# Altium PCB PCB2.PcbDoc (part 1 of 2)
Units mm, origin at the board's own origin, x right, y up, seen from the top; angles counter-clockwise.
Board outline 211.07 x 146.43 mm, 4 copper layers (Top Layer, Mid Layer 1, Mid Layer 2, Bottom Layer), stack 1.57 mm thick; 324 components, 350 nets, 1525 pads, 85 vias.
Unrouted connection lines stored in the file: 956.
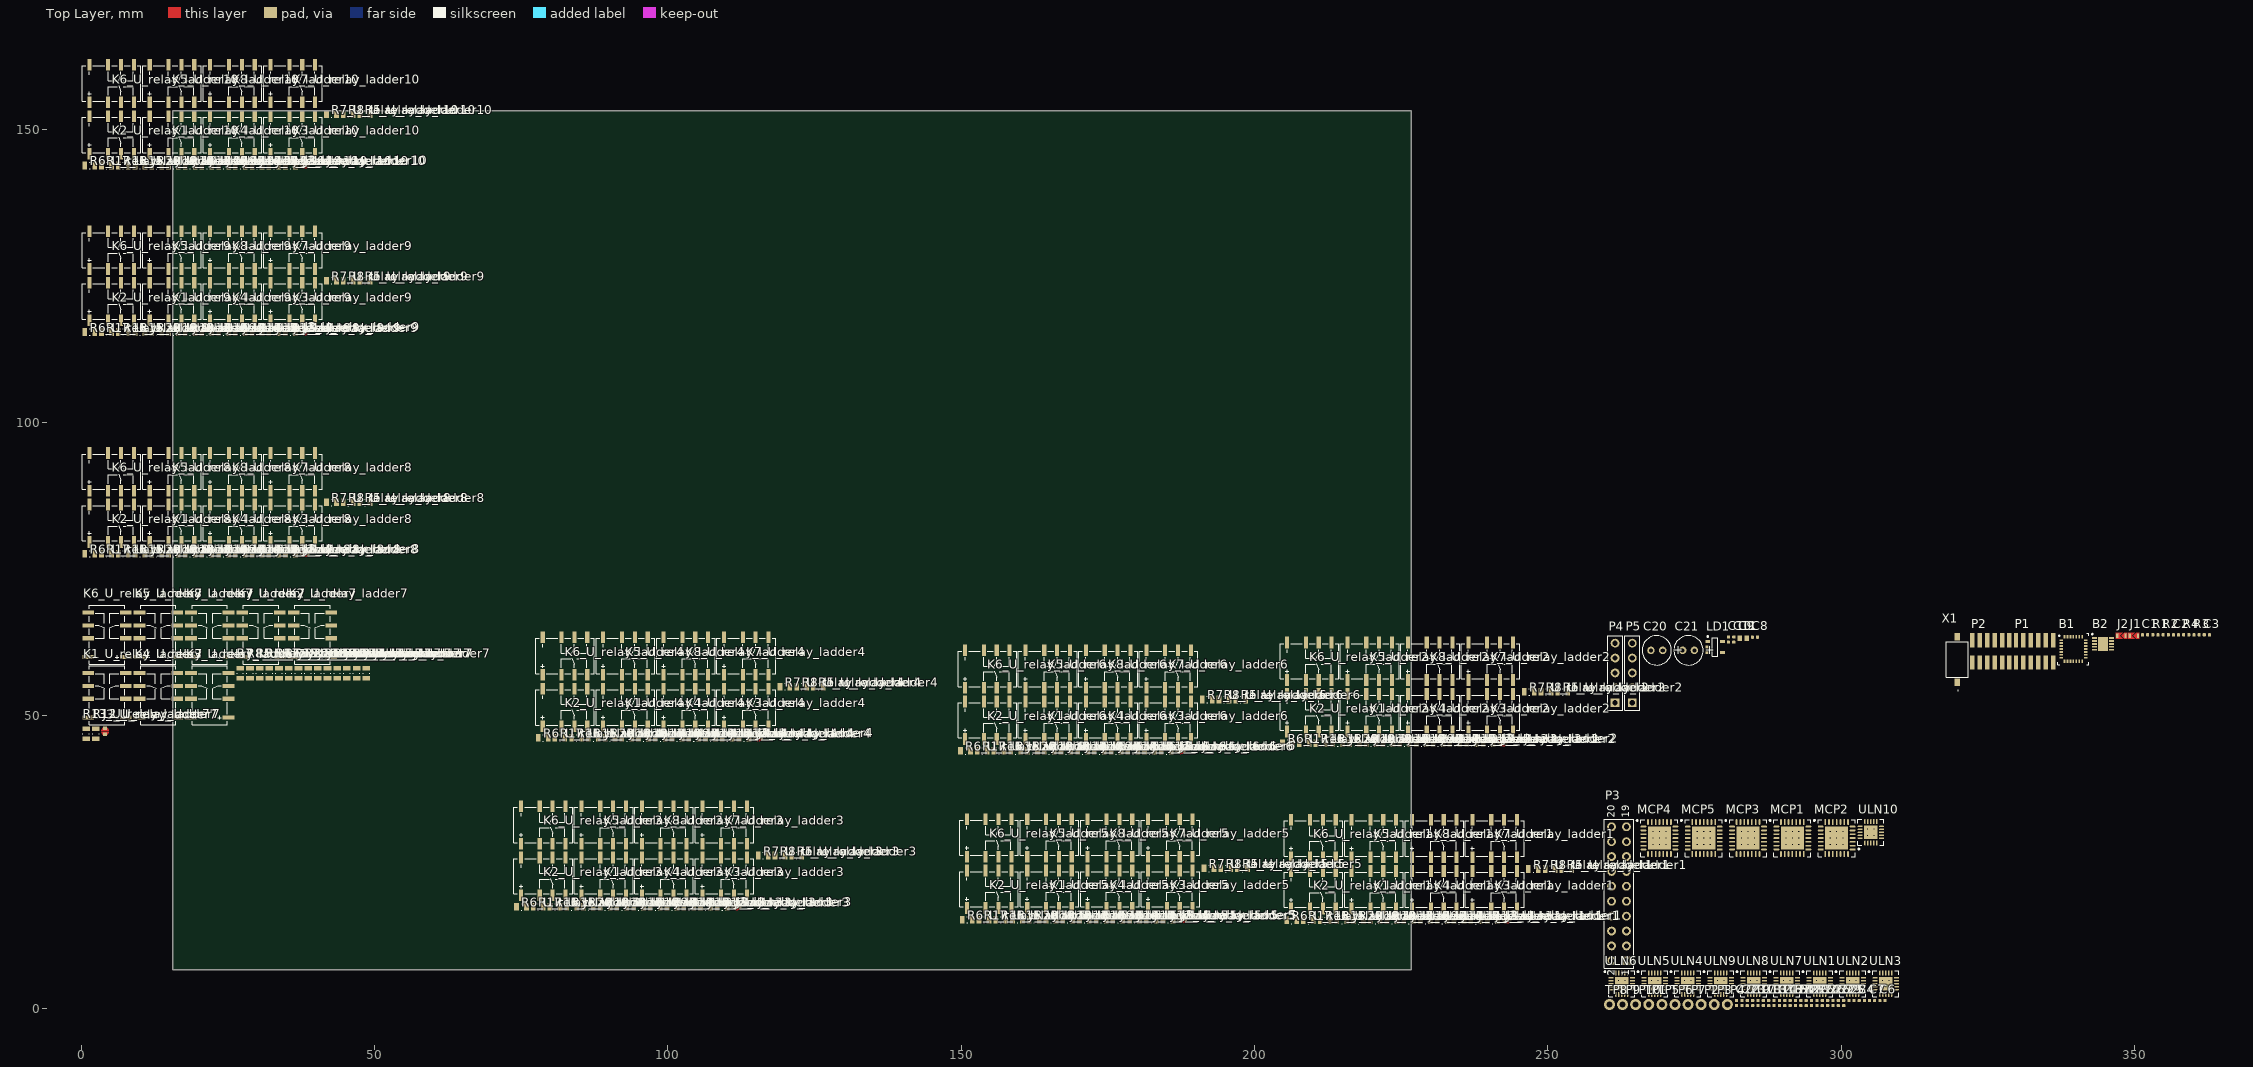
[diagram p0: Top Layer view]
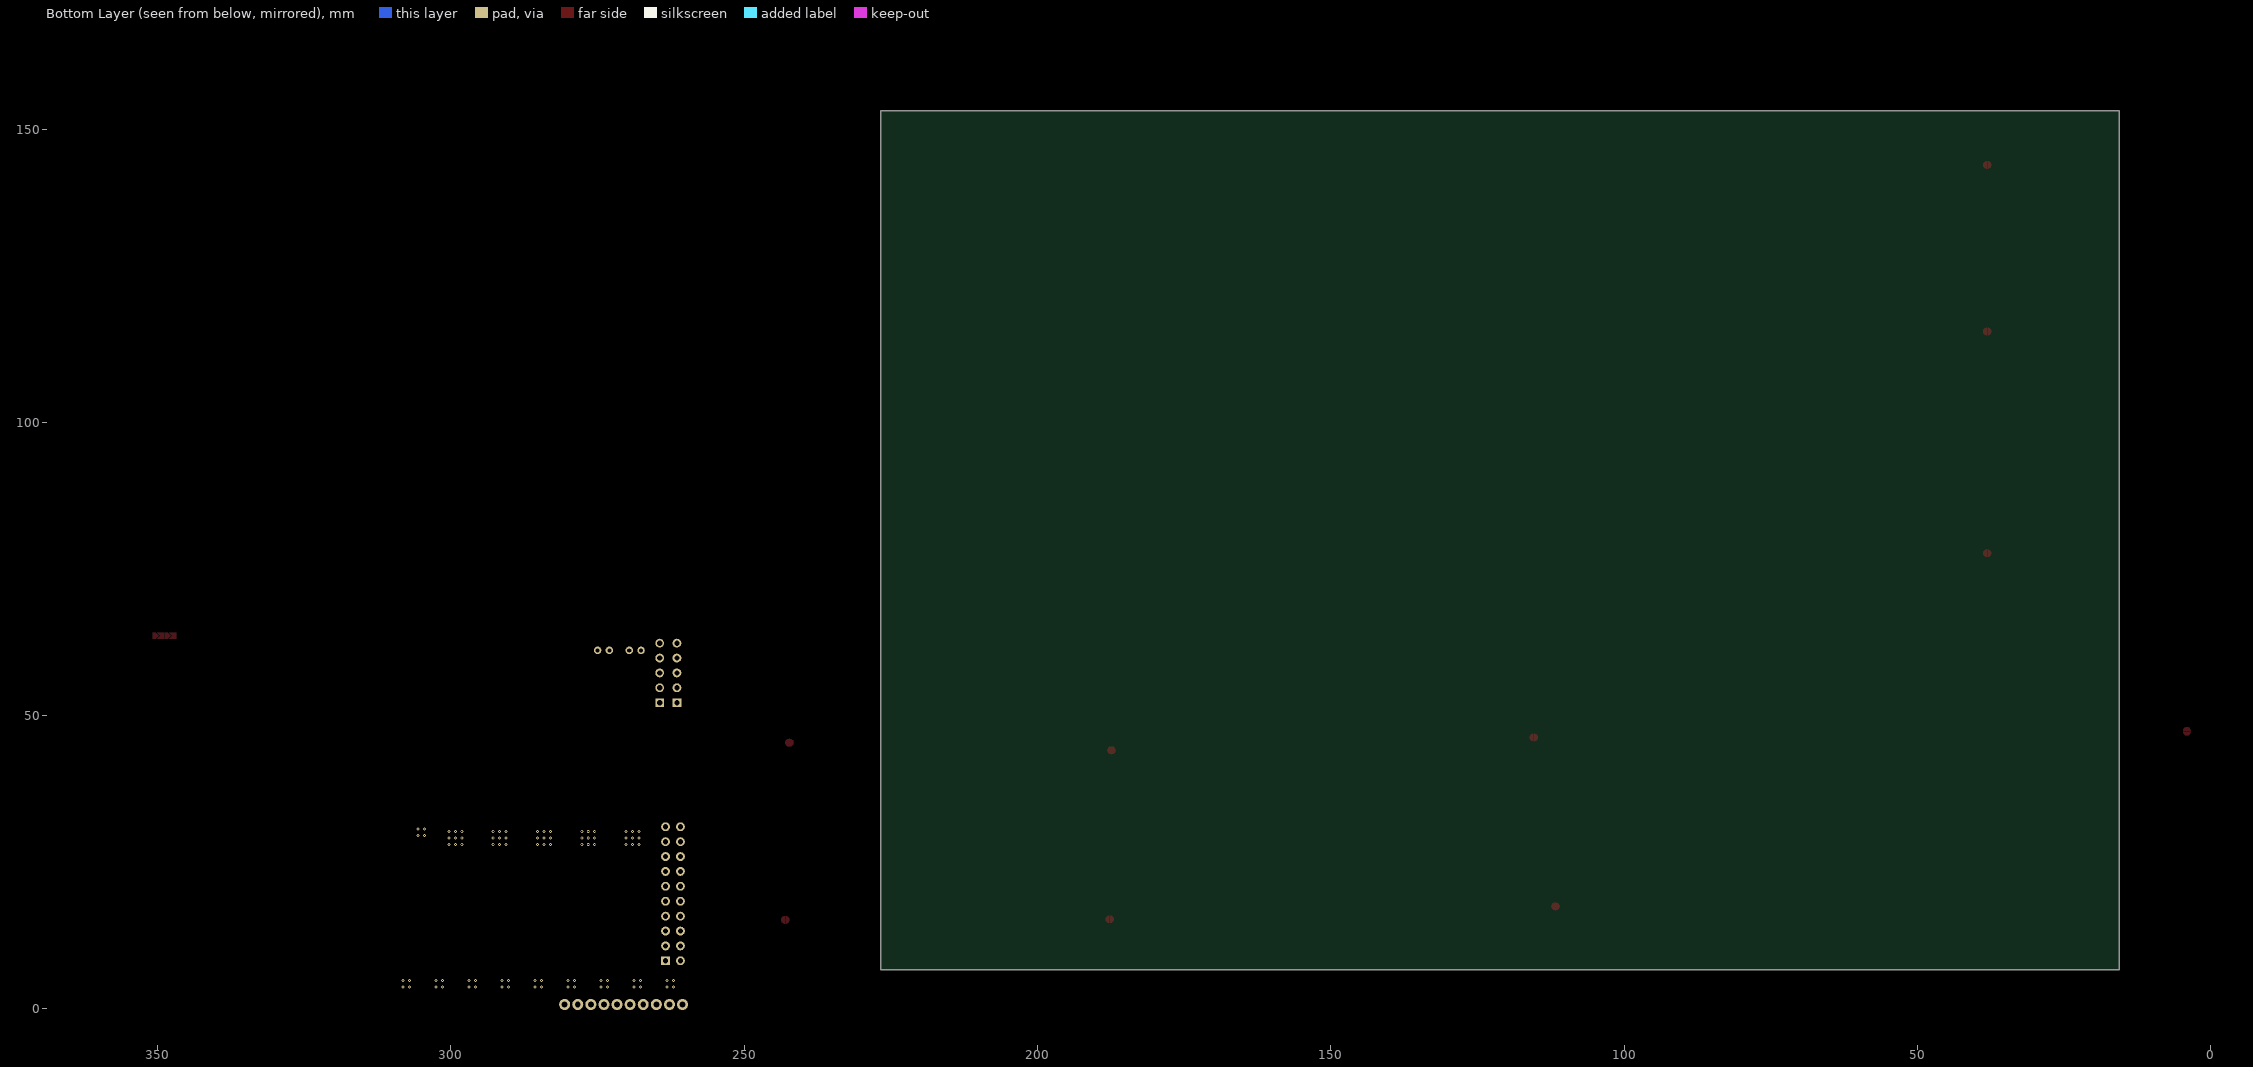
[diagram p1: Bottom Layer view, seen from below]

## Layer stack, top to bottom
Top Solder: solder mask 0.0127, Solder Resist, Dk 3.8
Top Layer: signal copper 0.035
Dielectric 1: prepreg 0.2, 7628, Dk 4.6
Mid Layer 1: signal copper 0.0175
Core: core 1.065, FR-4, Dk 4.5
Mid Layer 2: signal copper 0.0175
Dielectric 2: prepreg 0.2, 7628, Dk 4.6
Bottom Layer: signal copper 0.035
Bottom Solder: solder mask 0.0127, Solder Resist, Dk 3.8

## Board outline
15.621,6.731 15.621,153.162 226.695,153.162 226.695,6.731

## Design rules (kind name [scope] priority, off if disabled: settings)
BoardOutlineClearance [All] p1: gap=0.2 ignorepadtopadclearanceinfootprint=FALSE
Clearance [All] p1: gap=0.102 ignorepadtopadclearanceinfootprint=FALSE except(0.127: Arc-Via Track-Via SMDPad-Via THPad-Via Via-Via Via-Fill Via-Poly Via-Region Via-Text; 0.25: Arc-Hole Track-Hole SMDPad-Hole THPad-Hole Via-Hole Fill-Hole Poly-Hole Region-Hole Text-Hole)
ComponentClearance [All] p1: gap=0.102 collisioncheckmode=3 verticalgap=0.102 showdistances=TRUE
DiffPairsRouting [All] p1: maxlimit=0.102 minlimit=0.102 mostfreqgap=0.102 toplayer_minwidth=0.102 toplayer_maxwidth=1816.048 toplayer_prefwidth=0.102 midlayer1_minwidth=0.102 midlayer1_maxwidth=1816.048 midlayer1_prefwidth=0.102 midlayer2_minwidth=0.102 midlayer2_maxwidth=1816.048 midlayer2_prefwidth=0.102 bottomlayer_minwidth=0.102 bottomlayer_maxwidth=1816.048 bottomlayer_prefwidth=0.102 maxuncoupledlength=12.7
Height [All] p1: minheight=0 maxheight=1816.048 prefheight=12.7
HoleSize [All] p1: absolutevalues=TRUE maxlimit=6.3 minlimit=0.2 maxpercent=80.000 minpercent=20.000
HoleToHoleClearance [All] p1: gap=0.25 allowstackedmicrovias=FALSE
MinimumAnnularRing [All] p1: minimumring=0.076
MinimumSolderMaskSliver [All] p1: minsoldermaskwidth=0
PlaneClearance [All] p1: clearance=0.102
PlaneConnect PlaneConnectPowerPads [InPadClass('PowerPads')] p1: planeconnectstyle=Direct reliefexpansion=0.508 reliefentries=4 reliefconductorwidth=0.254 reliefairgap=0.254
PlaneConnect [All] p2: pad.planeconnectstyle=Relief pad.reliefexpansion=0.3 pad.reliefentries=4 pad.reliefconductorwidth=0.102 pad.reliefairgap=0.102 via.planeconnectstyle=Direct via.reliefexpansion=0.3 via.reliefentries=4 via.reliefconductorwidth=0.127 via.reliefairgap=0.127
PolygonConnect PolygonConnectPowerPads [All vs (InPadClass('PowerPads'))] p1: connectstyle=Direct reliefconductorwidth=0.254 reliefentries=4 polygonreliefangle="90 Angle" airgapwidth=0.254
PolygonConnect [All] p2: thpad.connectstyle=Relief thpad.reliefconductorwidth=0.102 thpad.reliefentries=4 thpad.polygonreliefangle="90 Angle" thpad.airgapwidth=0.102 smdpad.connectstyle=Relief smdpad.reliefconductorwidth=0.102 smdpad.reliefentries=4 smdpad.polygonreliefangle="90 Angle" smdpad.airgapwidth=0.102 via.connectstyle=Direct via.reliefconductorwidth=0.127 via.reliefentries=4 via.polygonreliefangle="90 Angle" via.airgapwidth=0.127
RoomDefinition U_relay_ladder10 [InComponentClass('U_relay_ladder10')] p1: confinementstyle=ConfineIn formatcopy=TRUE lockcomponents=FALSE outline 0,137 50.8,137 50.8,162.4 0,162.4
RoomDefinition U_relay_ladder9 [InComponentClass('U_relay_ladder9')] p2: confinementstyle=ConfineIn formatcopy=TRUE lockcomponents=FALSE outline 0,108.6 50.8,108.6 50.8,134 0,134
RoomDefinition U_relay_ladder8 [InComponentClass('U_relay_ladder8')] p3: confinementstyle=ConfineIn formatcopy=TRUE lockcomponents=FALSE outline 0,70.8 50.8,70.8 50.8,96.2 0,96.2
RoomDefinition U_relay_ladder7 [InComponentClass('U_relay_ladder7')] p4: confinementstyle=ConfineIn formatcopy=TRUE lockcomponents=FALSE outline 0,43.8 50.8,43.8 50.8,69.2 0,69.2
RoomDefinition U_relay_ladder6 [InComponentClass('U_relay_ladder6')] p5: confinementstyle=ConfineIn formatcopy=TRUE lockcomponents=FALSE outline 149.3,37.2 200.1,37.2 200.1,62.6 149.3,62.6
RoomDefinition U_relay_ladder5 [InComponentClass('U_relay_ladder5')] p6: confinementstyle=ConfineIn formatcopy=TRUE lockcomponents=FALSE outline 149.6,8.4 200.4,8.4 200.4,33.8 149.6,33.8
RoomDefinition U_relay_ladder4 [InComponentClass('U_relay_ladder4')] p7: confinementstyle=ConfineIn formatcopy=TRUE lockcomponents=FALSE outline 77.3,39.4 128.1,39.4 128.1,64.8 77.3,64.8
RoomDefinition U_relay_ladder3 [InComponentClass('U_relay_ladder3')] p8: confinementstyle=ConfineIn formatcopy=TRUE lockcomponents=FALSE outline 73.6,10.6 124.4,10.6 124.4,36 73.6,36
RoomDefinition U_relay_ladder2 [InComponentClass('U_relay_ladder2')] p9: confinementstyle=ConfineIn formatcopy=TRUE lockcomponents=FALSE outline 204.2,38.5 255,38.5 255,63.9 204.2,63.9
RoomDefinition U_relay_ladder1 [InComponentClass('U_relay_ladder1')] p10: confinementstyle=ConfineIn formatcopy=TRUE lockcomponents=FALSE outline 204.9,8.3 255.7,8.3 255.7,33.7 204.9,33.7
RoomDefinition U_relay_driver [InComponentClass('U_relay_driver')] p11: confinementstyle=ConfineIn formatcopy=TRUE lockcomponents=FALSE outline 259.4,7.4 310.2,7.4 310.2,32.8 259.4,32.8
RoomDefinition U_Power [InComponentClass('U_Power')] p12: confinementstyle=ConfineIn formatcopy=TRUE lockcomponents=FALSE outline 260,38.7 310.8,38.7 310.8,64.1 260,64.1
RoomDefinition U_MCU [InComponentClass('U_MCU')] p13: confinementstyle=ConfineIn formatcopy=TRUE lockcomponents=FALSE outline 317.8,39.1 368.6,39.1 368.6,64.5 317.8,64.5
RoutingVias [All] p1: holewidth=0.2 width=0.45 viastyle="Through Hole" minholewidth=0.2 minwidth=0.45 maxholewidth=6.3 maxwidth=6.55
SilkToSilkClearance [All] p1: silktosilkclearance=0
SilkToSolderMaskClearance [IsPad] p1: minsilkscreentomaskgap=0.102 clearancetoexposedcopper=TRUE
SolderMaskExpansion [All] p1: expansion=0.075 istentingtop=FALSE
Width [All] p1: maxlimit=1816.048 minlimit=0.102 preferedwidth=0.102
20 further rules are at their usual default settings.

## Classes and differential pairs
component class U_relay_ladder2: J3_U_relay_ladder2 K1_U_relay_ladder2 K2_U_relay_ladder2 K3_U_relay_ladder2 K4_U_relay_ladder2 K5_U_relay_ladder2 K6_U_relay_ladder2 K7_U_relay_ladder2 K8_U_relay_ladder2 R5_U_relay_ladder2 R6_U_relay_ladder2 R7_U_relay_ladder2 R8_U_relay_ladder2 R9_U_relay_ladder2 R10_U_relay_ladder2 R11_U_relay_ladder2 R12_U_relay_ladder2 R13_U_relay_ladder2 R14_U_relay_ladder2 R15_U_relay_ladder2 R16_U_relay_ladder2 R17_U_relay_ladder2 R18_U_relay_ladder2 R19_U_relay_ladder2 R20_U_relay_ladder2
component class U_relay_ladder1: J3_U_relay_ladder1 K1_U_relay_ladder1 K2_U_relay_ladder1 K3_U_relay_ladder1 K4_U_relay_ladder1 K5_U_relay_ladder1 K6_U_relay_ladder1 K7_U_relay_ladder1 K8_U_relay_ladder1 R5_U_relay_ladder1 R6_U_relay_ladder1 R7_U_relay_ladder1 R8_U_relay_ladder1 R9_U_relay_ladder1 R10_U_relay_ladder1 R11_U_relay_ladder1 R12_U_relay_ladder1 R13_U_relay_ladder1 R14_U_relay_ladder1 R15_U_relay_ladder1 R16_U_relay_ladder1 R17_U_relay_ladder1 R18_U_relay_ladder1 R19_U_relay_ladder1 R20_U_relay_ladder1
channel class relay_ladder: U_relay_ladder01 U_relay_ladder02 U_relay_ladder3 U_relay_ladder4 U_relay_ladder5 U_relay_ladder6 U_relay_ladder7 U_relay_ladder8 U_relay_ladder9 U_relay_ladder10
component class U_relay_ladder10: J3_U_relay_ladder10 K1_U_relay_ladder10 K2_U_relay_ladder10 K3_U_relay_ladder10 K4_U_relay_ladder10 K5_U_relay_ladder10 K6_U_relay_ladder10 K7_U_relay_ladder10 K8_U_relay_ladder10 R5_U_relay_ladder10 R6_U_relay_ladder10 R7_U_relay_ladder10 R8_U_relay_ladder10 R9_U_relay_ladder10 R10_U_relay_ladder10 R11_U_relay_ladder10 R12_U_relay_ladder10 R13_U_relay_ladder10 R14_U_relay_ladder10 R15_U_relay_ladder10 R16_U_relay_ladder10 R17_U_relay_ladder10 R18_U_relay_ladder10 R19_U_relay_ladder10 R20_U_relay_ladder10
component class U_relay_ladder9: J3_U_relay_ladder9 K1_U_relay_ladder9 K2_U_relay_ladder9 K3_U_relay_ladder9 K4_U_relay_ladder9 K5_U_relay_ladder9 K6_U_relay_ladder9 K7_U_relay_ladder9 K8_U_relay_ladder9 R5_U_relay_ladder9 R6_U_relay_ladder9 R7_U_relay_ladder9 R8_U_relay_ladder9 R9_U_relay_ladder9 R10_U_relay_ladder9 R11_U_relay_ladder9 R12_U_relay_ladder9 R13_U_relay_ladder9 R14_U_relay_ladder9 R15_U_relay_ladder9 R16_U_relay_ladder9 R17_U_relay_ladder9 R18_U_relay_ladder9 R19_U_relay_ladder9 R20_U_relay_ladder9
component class U_relay_ladder8: J3_U_relay_ladder8 K1_U_relay_ladder8 K2_U_relay_ladder8 K3_U_relay_ladder8 K4_U_relay_ladder8 K5_U_relay_ladder8 K6_U_relay_ladder8 K7_U_relay_ladder8 K8_U_relay_ladder8 R5_U_relay_ladder8 R6_U_relay_ladder8 R7_U_relay_ladder8 R8_U_relay_ladder8 R9_U_relay_ladder8 R10_U_relay_ladder8 R11_U_relay_ladder8 R12_U_relay_ladder8 R13_U_relay_ladder8 R14_U_relay_ladder8 R15_U_relay_ladder8 R16_U_relay_ladder8 R17_U_relay_ladder8 R18_U_relay_ladder8 R19_U_relay_ladder8 R20_U_relay_ladder8
component class U_relay_ladder7: J3_U_relay_ladder7 K1_U_relay_ladder7 K2_U_relay_ladder7 K3_U_relay_ladder7 K4_U_relay_ladder7 K5_U_relay_ladder7 K6_U_relay_ladder7 K7_U_relay_ladder7 K8_U_relay_ladder7 R5_U_relay_ladder7 R6_U_relay_ladder7 R7_U_relay_ladder7 R8_U_relay_ladder7 R9_U_relay_ladder7 R10_U_relay_ladder7 R11_U_relay_ladder7 R12_U_relay_ladder7 R13_U_relay_ladder7 R14_U_relay_ladder7 R15_U_relay_ladder7 R16_U_relay_ladder7 R17_U_relay_ladder7 R18_U_relay_ladder7 R19_U_relay_ladder7 R20_U_relay_ladder7
component class U_relay_ladder6: J3_U_relay_ladder6 K1_U_relay_ladder6 K2_U_relay_ladder6 K3_U_relay_ladder6 K4_U_relay_ladder6 K5_U_relay_ladder6 K6_U_relay_ladder6 K7_U_relay_ladder6 K8_U_relay_ladder6 R5_U_relay_ladder6 R6_U_relay_ladder6 R7_U_relay_ladder6 R8_U_relay_ladder6 R9_U_relay_ladder6 R10_U_relay_ladder6 R11_U_relay_ladder6 R12_U_relay_ladder6 R13_U_relay_ladder6 R14_U_relay_ladder6 R15_U_relay_ladder6 R16_U_relay_ladder6 R17_U_relay_ladder6 R18_U_relay_ladder6 R19_U_relay_ladder6 R20_U_relay_ladder6
component class U_relay_ladder5: J3_U_relay_ladder5 K1_U_relay_ladder5 K2_U_relay_ladder5 K3_U_relay_ladder5 K4_U_relay_ladder5 K5_U_relay_ladder5 K6_U_relay_ladder5 K7_U_relay_ladder5 K8_U_relay_ladder5 R5_U_relay_ladder5 R6_U_relay_ladder5 R7_U_relay_ladder5 R8_U_relay_ladder5 R9_U_relay_ladder5 R10_U_relay_ladder5 R11_U_relay_ladder5 R12_U_relay_ladder5 R13_U_relay_ladder5 R14_U_relay_ladder5 R15_U_relay_ladder5 R16_U_relay_ladder5 R17_U_relay_ladder5 R18_U_relay_ladder5 R19_U_relay_ladder5 R20_U_relay_ladder5
component class U_relay_ladder4: J3_U_relay_ladder4 K1_U_relay_ladder4 K2_U_relay_ladder4 K3_U_relay_ladder4 K4_U_relay_ladder4 K5_U_relay_ladder4 K6_U_relay_ladder4 K7_U_relay_ladder4 K8_U_relay_ladder4 R5_U_relay_ladder4 R6_U_relay_ladder4 R7_U_relay_ladder4 R8_U_relay_ladder4 R9_U_relay_ladder4 R10_U_relay_ladder4 R11_U_relay_ladder4 R12_U_relay_ladder4 R13_U_relay_ladder4 R14_U_relay_ladder4 R15_U_relay_ladder4 R16_U_relay_ladder4 R17_U_relay_ladder4 R18_U_relay_ladder4 R19_U_relay_ladder4 R20_U_relay_ladder4
component class U_relay_ladder3: J3_U_relay_ladder3 K1_U_relay_ladder3 K2_U_relay_ladder3 K3_U_relay_ladder3 K4_U_relay_ladder3 K5_U_relay_ladder3 K6_U_relay_ladder3 K7_U_relay_ladder3 K8_U_relay_ladder3 R5_U_relay_ladder3 R6_U_relay_ladder3 R7_U_relay_ladder3 R8_U_relay_ladder3 R9_U_relay_ladder3 R10_U_relay_ladder3 R11_U_relay_ladder3 R12_U_relay_ladder3 R13_U_relay_ladder3 R14_U_relay_ladder3 R15_U_relay_ladder3 R16_U_relay_ladder3 R17_U_relay_ladder3 R18_U_relay_ladder3 R19_U_relay_ladder3 R20_U_relay_ladder3
component class U_relay_driver: C4 C5 C6 C7 C12 C13 C14 C15 C16 C17 C18 C19 C22 C23 C24 C25 C26 C27 C28 C29 MCP1 MCP2 MCP3 MCP4 MCP5 P3 R21 R22 R23 R24 R25 TP1 TP2 TP3 TP4 TP5 TP6 TP7 TP8 TP9 TP10 ULN1 ULN2 ULN3 ULN4 ULN5 ULN6 ULN7 ULN8 ULN9 ULN10
component class U_Power: C8 C9 C10 C11 C20 C21 LD1 P4 P5
component class U_MCU: B1 B2 C1 C2 C3 J1 J2 P1 P2 R1 R2 R3 R4 X1

## Components (designator, comment, footprint, x,y, rotation, side; value= is the part's Value field where it differs from the comment)
B1 "STM32C031G6U6" QFN50P400X400X60-28N-D 339.598,61.377 r0 top
B2 "XR33202EEHBTR-F" SON50P300X300X80-11N-D 344.693,62.244 r0 top
C1 "100n" R1005_0402i_L 351.838,63.789 r0 top
C2 "100n" R1005_0402i_L 357.098,63.789 r0 top
C3 "100n" R1005_0402i_L 362.357,63.789 r0 top
C4 "100n" R1005_0402i_L 303.535,1.433 r0 top
C5 "100n" R1005_0402i_L 301.782,1.433 r0 top
C6 "100n" R1005_0402i_L 307.041,1.433 r0 top
C7 "100n" R1005_0402i_L 305.288,1.433 r0 top
C8 "100n" R1005_0402i_L 285.322,63.389 r0 top
C9 "22u" C1608_0603I_L 283.309,63.219 r0 top
C10 "1u" R1005_0402i_L 280.803,62.969 r90 top
C11 "100n" R1005_0402i_L 281.716,62.969 r90 top
C12 "100n" R1005_0402i_L 287.664,1.013 r90 top
C13 "100n" R1005_0402i_L 286.751,1.013 r90 top
C14 "100n" R1005_0402i_L 288.577,1.013 r90 top
C15 "100n" R1005_0402i_L 290.403,1.013 r90 top
C16 "100n" R1005_0402i_L 289.49,1.013 r90 top
C17 "100n" R1005_0402i_L 284.924,1.013 r90 top
C18 "100n" R1005_0402i_L 285.837,1.013 r90 top
C19 "100n" R1005_0402i_L 284.011,1.013 r90 top
C20 "C+" "C AlElko 5x11 R2" 268.588,61.144 r0 top
C21 "C+" "C AlElko 5x11 R2" 273.991,61.144 r0 top
C22 "100n" R1005_0402i_L 282.185,1.013 r90 top
C23 "100n" R1005_0402i_L 283.098,1.013 r90 top
C24 "100n" R1005_0402i_L 291.317,1.013 r90 top
C25 "100n" R1005_0402i_L 297.709,1.013 r90 top
C26 "100n" R1005_0402i_L 296.796,1.013 r90 top
C27 "100n" R1005_0402i_L 298.622,1.013 r90 top
C28 "100n" R1005_0402i_L 300.449,1.013 r90 top
C29 "100n" R1005_0402i_L 299.535,1.013 r90 top
J1 "solder_jumper" solder_jumper_triangle 349.463,63.128 r0 top
J2 "solder_jumper" solder_jumper_triangle 347.355,63.128 r0 top
J3_U_relay_ladder1 "JMP_mini" solderJumper 242.994,15.201 r0 top (schematic designator J3)
J3_U_relay_ladder2 "JMP_mini" solderJumper 242.294,45.401 r0 top (schematic designator J3)
J3_U_relay_ladder3 "JMP_mini" solderJumper 111.694,17.501 r0 top (schematic designator J3)
J3_U_relay_ladder4 "JMP_mini" solderJumper 115.394,46.301 r0 top (schematic designator J3)
J3_U_relay_ladder5 "JMP_mini" solderJumper 187.694,15.301 r0 top (schematic designator J3)
J3_U_relay_ladder6 "JMP_mini" solderJumper 187.394,44.101 r0 top (schematic designator J3)
J3_U_relay_ladder7 "JMP_mini" solderJumper 4.043,47.337 r90 top (schematic designator J3)
J3_U_relay_ladder8 "JMP_mini" solderJumper 38.094,77.701 r0 top (schematic designator J3)
J3_U_relay_ladder9 "JMP_mini" solderJumper 38.094,115.501 r0 top (schematic designator J3)
J3_U_relay_ladder10 "JMP_mini" solderJumper 38.094,143.901 r0 top (schematic designator J3)
K1_U_relay_ladder1 "DPDT" "AXICOM IM-G Relay" 220.355,20.315 r0 top (schematic designator K1)
K1_U_relay_ladder2 "DPDT" "AXICOM IM-G Relay" 219.655,50.515 r0 top (schematic designator K1)
K1_U_relay_ladder3 "DPDT" "AXICOM IM-G Relay" 89.055,22.615 r0 top (schematic designator K1)
K1_U_relay_ladder4 "DPDT" "AXICOM IM-G Relay" 92.755,51.415 r0 top (schematic designator K1)
K1_U_relay_ladder5 "DPDT" "AXICOM IM-G Relay" 165.055,20.415 r0 top (schematic designator K1)
K1_U_relay_ladder6 "DPDT" "AXICOM IM-G Relay" 164.755,49.215 r0 top (schematic designator K1)
K1_U_relay_ladder7 "DPDT" "AXICOM IM-G Relay" 4.377,53.491 r90 top (schematic designator K1)
K1_U_relay_ladder8 "DPDT" "AXICOM IM-G Relay" 15.455,82.815 r0 top (schematic designator K1)
K1_U_relay_ladder9 "DPDT" "AXICOM IM-G Relay" 15.455,120.615 r0 top (schematic designator K1)
K1_U_relay_ladder10 "DPDT" "AXICOM IM-G Relay" 15.455,149.015 r0 top (schematic designator K1)
K2_U_relay_ladder1 "DPDT" "AXICOM IM-G Relay" 210.052,20.315 r0 top (schematic designator K2)
K2_U_relay_ladder2 "DPDT" "AXICOM IM-G Relay" 209.352,50.515 r0 top (schematic designator K2)
K2_U_relay_ladder3 "DPDT" "AXICOM IM-G Relay" 78.752,22.615 r0 top (schematic designator K2)
K2_U_relay_ladder4 "DPDT" "AXICOM IM-G Relay" 82.452,51.415 r0 top (schematic designator K2)
K2_U_relay_ladder5 "DPDT" "AXICOM IM-G Relay" 154.752,20.415 r0 top (schematic designator K2)
K2_U_relay_ladder6 "DPDT" "AXICOM IM-G Relay" 154.452,49.215 r0 top (schematic designator K2)
K2_U_relay_ladder7 "DPDT" "AXICOM IM-G Relay" 39.393,63.794 r90 top (schematic designator K2)
K2_U_relay_ladder8 "DPDT" "AXICOM IM-G Relay" 5.152,82.815 r0 top (schematic designator K2)
K2_U_relay_ladder9 "DPDT" "AXICOM IM-G Relay" 5.152,120.615 r0 top (schematic designator K2)
K2_U_relay_ladder10 "DPDT" "AXICOM IM-G Relay" 5.152,149.015 r0 top (schematic designator K2)
K3_U_relay_ladder1 "DPDT" "AXICOM IM-G Relay" 240.961,20.315 r0 top (schematic designator K3)
K3_U_relay_ladder2 "DPDT" "AXICOM IM-G Relay" 240.261,50.515 r0 top (schematic designator K3)
K3_U_relay_ladder3 "DPDT" "AXICOM IM-G Relay" 109.661,22.615 r0 top (schematic designator K3)
K3_U_relay_ladder4 "DPDT" "AXICOM IM-G Relay" 113.361,51.415 r0 top (schematic designator K3)
K3_U_relay_ladder5 "DPDT" "AXICOM IM-G Relay" 185.661,20.415 r0 top (schematic designator K3)
K3_U_relay_ladder6 "DPDT" "AXICOM IM-G Relay" 185.361,49.215 r0 top (schematic designator K3)
K3_U_relay_ladder7 "DPDT" "AXICOM IM-G Relay" 21.885,53.491 r90 top (schematic designator K3)
K3_U_relay_ladder8 "DPDT" "AXICOM IM-G Relay" 36.061,82.815 r0 top (schematic designator K3)
K3_U_relay_ladder9 "DPDT" "AXICOM IM-G Relay" 36.061,120.615 r0 top (schematic designator K3)
K3_U_relay_ladder10 "DPDT" "AXICOM IM-G Relay" 36.061,149.015 r0 top (schematic designator K3)
K4_U_relay_ladder1 "DPDT" "AXICOM IM-G Relay" 230.658,20.315 r0 top (schematic designator K4)
K4_U_relay_ladder2 "DPDT" "AXICOM IM-G Relay" 229.958,50.515 r0 top (schematic designator K4)
K4_U_relay_ladder3 "DPDT" "AXICOM IM-G Relay" 99.358,22.615 r0 top (schematic designator K4)
K4_U_relay_ladder4 "DPDT" "AXICOM IM-G Relay" 103.058,51.415 r0 top (schematic designator K4)
K4_U_relay_ladder5 "DPDT" "AXICOM IM-G Relay" 175.358,20.415 r0 top (schematic designator K4)
K4_U_relay_ladder6 "DPDT" "AXICOM IM-G Relay" 175.058,49.215 r0 top (schematic designator K4)
K4_U_relay_ladder7 "DPDT" "AXICOM IM-G Relay" 13.131,53.491 r90 top (schematic designator K4)
K4_U_relay_ladder8 "DPDT" "AXICOM IM-G Relay" 25.758,82.815 r0 top (schematic designator K4)
K4_U_relay_ladder9 "DPDT" "AXICOM IM-G Relay" 25.758,120.615 r0 top (schematic designator K4)
K4_U_relay_ladder10 "DPDT" "AXICOM IM-G Relay" 25.758,149.015 r0 top (schematic designator K4)
K5_U_relay_ladder1 "DPDT" "AXICOM IM-G Relay" 220.355,29.069 r0 top (schematic designator K5)
K5_U_relay_ladder2 "DPDT" "AXICOM IM-G Relay" 219.655,59.269 r0 top (schematic designator K5)
K5_U_relay_ladder3 "DPDT" "AXICOM IM-G Relay" 89.055,31.369 r0 top (schematic designator K5)
K5_U_relay_ladder4 "DPDT" "AXICOM IM-G Relay" 92.755,60.169 r0 top (schematic designator K5)
K5_U_relay_ladder5 "DPDT" "AXICOM IM-G Relay" 165.055,29.169 r0 top (schematic designator K5)
K5_U_relay_ladder6 "DPDT" "AXICOM IM-G Relay" 164.755,57.969 r0 top (schematic designator K5)
K5_U_relay_ladder7 "DPDT" "AXICOM IM-G Relay" 13.131,63.794 r90 top (schematic designator K5)
K5_U_relay_ladder8 "DPDT" "AXICOM IM-G Relay" 15.455,91.569 r0 top (schematic designator K5)
K5_U_relay_ladder9 "DPDT" "AXICOM IM-G Relay" 15.455,129.369 r0 top (schematic designator K5)
K5_U_relay_ladder10 "DPDT" "AXICOM IM-G Relay" 15.455,157.769 r0 top (schematic designator K5)
K6_U_relay_ladder1 "DPDT" "AXICOM IM-G Relay" 210.052,29.069 r0 top (schematic designator K6)
K6_U_relay_ladder2 "DPDT" "AXICOM IM-G Relay" 209.352,59.269 r0 top (schematic designator K6)
K6_U_relay_ladder3 "DPDT" "AXICOM IM-G Relay" 78.752,31.369 r0 top (schematic designator K6)
K6_U_relay_ladder4 "DPDT" "AXICOM IM-G Relay" 82.452,60.169 r0 top (schematic designator K6)
K6_U_relay_ladder5 "DPDT" "AXICOM IM-G Relay" 154.752,29.169 r0 top (schematic designator K6)
K6_U_relay_ladder6 "DPDT" "AXICOM IM-G Relay" 154.452,57.969 r0 top (schematic designator K6)
K6_U_relay_ladder7 "DPDT" "AXICOM IM-G Relay" 4.377,63.794 r90 top (schematic designator K6)
K6_U_relay_ladder8 "DPDT" "AXICOM IM-G Relay" 5.152,91.569 r0 top (schematic designator K6)
K6_U_relay_ladder9 "DPDT" "AXICOM IM-G Relay" 5.152,129.369 r0 top (schematic designator K6)
K6_U_relay_ladder10 "DPDT" "AXICOM IM-G Relay" 5.152,157.769 r0 top (schematic designator K6)
K7_U_relay_ladder1 "DPDT" "AXICOM IM-G Relay" 240.961,29.069 r0 top (schematic designator K7)
K7_U_relay_ladder2 "DPDT" "AXICOM IM-G Relay" 240.261,59.269 r0 top (schematic designator K7)
K7_U_relay_ladder3 "DPDT" "AXICOM IM-G Relay" 109.661,31.369 r0 top (schematic designator K7)
K7_U_relay_ladder4 "DPDT" "AXICOM IM-G Relay" 113.361,60.169 r0 top (schematic designator K7)
K7_U_relay_ladder5 "DPDT" "AXICOM IM-G Relay" 185.661,29.169 r0 top (schematic designator K7)
K7_U_relay_ladder6 "DPDT" "AXICOM IM-G Relay" 185.361,57.969 r0 top (schematic designator K7)
K7_U_relay_ladder7 "DPDT" "AXICOM IM-G Relay" 30.639,63.794 r90 top (schematic designator K7)
K7_U_relay_ladder8 "DPDT" "AXICOM IM-G Relay" 36.061,91.569 r0 top (schematic designator K7)
K7_U_relay_ladder9 "DPDT" "AXICOM IM-G Relay" 36.061,129.369 r0 top (schematic designator K7)
K7_U_relay_ladder10 "DPDT" "AXICOM IM-G Relay" 36.061,157.769 r0 top (schematic designator K7)
K8_U_relay_ladder1 "DPDT" "AXICOM IM-G Relay" 230.658,29.069 r0 top (schematic designator K8)
K8_U_relay_ladder2 "DPDT" "AXICOM IM-G Relay" 229.958,59.269 r0 top (schematic designator K8)
K8_U_relay_ladder3 "DPDT" "AXICOM IM-G Relay" 99.358,31.369 r0 top (schematic designator K8)
K8_U_relay_ladder4 "DPDT" "AXICOM IM-G Relay" 103.058,60.169 r0 top (schematic designator K8)
K8_U_relay_ladder5 "DPDT" "AXICOM IM-G Relay" 175.358,29.169 r0 top (schematic designator K8)
K8_U_relay_ladder6 "DPDT" "AXICOM IM-G Relay" 175.058,57.969 r0 top (schematic designator K8)
K8_U_relay_ladder7 "DPDT" "AXICOM IM-G Relay" 21.885,63.794 r90 top (schematic designator K8)
K8_U_relay_ladder8 "DPDT" "AXICOM IM-G Relay" 25.758,91.569 r0 top (schematic designator K8)
K8_U_relay_ladder9 "DPDT" "AXICOM IM-G Relay" 25.758,129.369 r0 top (schematic designator K8)
K8_U_relay_ladder10 "DPDT" "AXICOM IM-G Relay" 25.758,157.769 r0 top (schematic designator K8)
LD1 "NCP115 3.3V" TSOP95P280X110-6L 278.519,61.719 r0 top
MCP1 "MCP32017" "MCP23017 QFN" 291.694,29.144 r0 top
MCP2 "MCP32017" "MCP23017 QFN" 299.248,29.144 r0 top
MCP3 "MCP32017" "MCP23017 QFN" 284.141,29.144 r0 top
MCP4 "MCP32017" "MCP23017 QFN" 269.035,29.144 r0 top
MCP5 "MCP32017" "MCP23017 QFN" 276.588,29.144 r0 top
P1 "Input" "1.27mm SMD conn" 332.998,60.964 r0 top
P2 "Output" "1.27mm SMD conn" 325.535,60.964 r0 top
P3 "Header 10X2" HDR2X10 263.412,8.214 r90 top
P4 "Header 5" HDR1X5 261.472,52.214 r90 top
P5 "Header 5" HDR1X5 264.415,52.214 r90 top
R1 "10k" R1005_0402i_L 353.591,63.789 r0 top
R2 "10k" R1005_0402i_L 355.344,63.789 r0 top
R3 "120" R1005_0402i_L 360.604,63.789 r0 top
R4 "100k" R1005_0402i_L 358.851,63.789 r0 top
R5_U_relay_ladder1 "R/2" R2012_0805I_L 253.246,23.865 r0 top (schematic designator R5)
R5_U_relay_ladder2 "R/2" R2012_0805I_L 252.546,54.065 r0 top (schematic designator R5)
R5_U_relay_ladder3 "R/2" R2012_0805I_L 121.946,26.165 r0 top (schematic designator R5)
R5_U_relay_ladder4 "R/2" R2012_0805I_L 125.646,54.965 r0 top (schematic designator R5)
R5_U_relay_ladder5 "R/2" R2012_0805I_L 197.946,23.965 r0 top (schematic designator R5)
R5_U_relay_ladder6 "R/2" R2012_0805I_L 197.646,52.765 r0 top (schematic designator R5)
R5_U_relay_ladder7 "R/2" R2012_0805I_L 30.395,57.216 r90 top (schematic designator R5)
R5_U_relay_ladder8 "R/2" R2012_0805I_L 48.346,86.365 r0 top (schematic designator R5)
R5_U_relay_ladder9 "R/2" R2012_0805I_L 48.346,124.165 r0 top (schematic designator R5)
R5_U_relay_ladder10 "R/2" R2012_0805I_L 48.346,152.565 r0 top (schematic designator R5)
R6_U_relay_ladder1 "R/4" R2012_0805I_L 206.327,15.111 r0 top (schematic designator R6)
R6_U_relay_ladder2 "R/4" R2012_0805I_L 205.627,45.311 r0 top (schematic designator R6)
R6_U_relay_ladder3 "R/4" R2012_0805I_L 75.027,17.411 r0 top (schematic designator R6)
R6_U_relay_ladder4 "R/4" R2012_0805I_L 78.727,46.211 r0 top (schematic designator R6)
R6_U_relay_ladder5 "R/4" R2012_0805I_L 151.027,15.211 r0 top (schematic designator R6)
R6_U_relay_ladder6 "R/4" R2012_0805I_L 150.727,44.011 r0 top (schematic designator R6)
R6_U_relay_ladder7 "R/4" R2012_0805I_L 32.048,57.216 r90 top (schematic designator R6)
R6_U_relay_ladder8 "R/4" R2012_0805I_L 1.427,77.611 r0 top (schematic designator R6)
R6_U_relay_ladder9 "R/4" R2012_0805I_L 1.427,115.411 r0 top (schematic designator R6)
R6_U_relay_ladder10 "R/4" R2012_0805I_L 1.427,143.811 r0 top (schematic designator R6)
R7_U_relay_ladder1 "R/8" R2012_0805I_L 247.539,23.865 r0 top (schematic designator R7)
R7_U_relay_ladder2 "R/8" R2012_0805I_L 246.839,54.065 r0 top (schematic designator R7)
R7_U_relay_ladder3 "R/8" R2012_0805I_L 116.239,26.165 r0 top (schematic designator R7)
R7_U_relay_ladder4 "R/8" R2012_0805I_L 119.939,54.965 r0 top (schematic designator R7)
R7_U_relay_ladder5 "R/8" R2012_0805I_L 192.239,23.965 r0 top (schematic designator R7)
R7_U_relay_ladder6 "R/8" R2012_0805I_L 191.939,52.765 r0 top (schematic designator R7)
R7_U_relay_ladder7 "R/8" R2012_0805I_L 27.089,57.216 r90 top (schematic designator R7)
R7_U_relay_ladder8 "R/8" R2012_0805I_L 42.639,86.365 r0 top (schematic designator R7)
R7_U_relay_ladder9 "R/8" R2012_0805I_L 42.639,124.165 r0 top (schematic designator R7)
R7_U_relay_ladder10 "R/8" R2012_0805I_L 42.639,152.565 r0 top (schematic designator R7)
R8_U_relay_ladder1 "R/16" R2012_0805I_L 250.393,23.865 r0 top (schematic designator R8)
R8_U_relay_ladder2 "R/16" R2012_0805I_L 249.693,54.065 r0 top (schematic designator R8)
R8_U_relay_ladder3 "R/16" R2012_0805I_L 119.093,26.165 r0 top (schematic designator R8)
R8_U_relay_ladder4 "R/16" R2012_0805I_L 122.793,54.965 r0 top (schematic designator R8)
R8_U_relay_ladder5 "R/16" R2012_0805I_L 195.093,23.965 r0 top (schematic designator R8)
R8_U_relay_ladder6 "R/16" R2012_0805I_L 194.793,52.765 r0 top (schematic designator R8)
R8_U_relay_ladder7 "R/16" R2012_0805I_L 28.742,57.216 r90 top (schematic designator R8)
R8_U_relay_ladder8 "R/16" R2012_0805I_L 45.493,86.365 r0 top (schematic designator R8)
R8_U_relay_ladder9 "R/16" R2012_0805I_L 45.493,124.165 r0 top (schematic designator R8)
R8_U_relay_ladder10 "R/16" R2012_0805I_L 45.493,152.565 r0 top (schematic designator R8)
R9_U_relay_ladder1 "R/32" R2012_0805I_L 232.005,15.111 r0 top (schematic designator R9)
R9_U_relay_ladder2 "R/32" R2012_0805I_L 231.305,45.311 r0 top (schematic designator R9)
R9_U_relay_ladder3 "R/32" R2012_0805I_L 100.705,17.411 r0 top (schematic designator R9)
R9_U_relay_ladder4 "R/32" R2012_0805I_L 104.405,46.211 r0 top (schematic designator R9)
R9_U_relay_ladder5 "R/32" R2012_0805I_L 176.705,15.211 r0 top (schematic designator R9)
R9_U_relay_ladder6 "R/32" R2012_0805I_L 176.405,44.011 r0 top (schematic designator R9)
R9_U_relay_ladder7 "R/32" R2012_0805I_L 46.927,57.216 r90 top (schematic designator R9)
R9_U_relay_ladder8 "R/32" R2012_0805I_L 27.105,77.611 r0 top (schematic designator R9)
R9_U_relay_ladder9 "R/32" R2012_0805I_L 27.105,115.411 r0 top (schematic designator R9)
R9_U_relay_ladder10 "R/32" R2012_0805I_L 27.105,143.811 r0 top (schematic designator R9)
R10_U_relay_ladder1 "R/64" R2012_0805I_L 229.152,15.111 r0 top (schematic designator R10)
R10_U_relay_ladder2 "R/64" R2012_0805I_L 228.452,45.311 r0 top (schematic designator R10)
R10_U_relay_ladder3 "R/64" R2012_0805I_L 97.852,17.411 r0 top (schematic designator R10)
R10_U_relay_ladder4 "R/64" R2012_0805I_L 101.552,46.211 r0 top (schematic designator R10)
R10_U_relay_ladder5 "R/64" R2012_0805I_L 173.852,15.211 r0 top (schematic designator R10)
R10_U_relay_ladder6 "R/64" R2012_0805I_L 173.552,44.011 r0 top (schematic designator R10)
R10_U_relay_ladder7 "R/64" R2012_0805I_L 45.274,57.216 r90 top (schematic designator R10)
R10_U_relay_ladder8 "R/64" R2012_0805I_L 24.252,77.611 r0 top (schematic designator R10)
R10_U_relay_ladder9 "R/64" R2012_0805I_L 24.252,115.411 r0 top (schematic designator R10)
R10_U_relay_ladder10 "R/64" R2012_0805I_L 24.252,143.811 r0 top (schematic designator R10)
R11_U_relay_ladder1 "R/128" R2012_0805I_L 226.299,15.111 r0 top (schematic designator R11)
R11_U_relay_ladder2 "R/128" R2012_0805I_L 225.599,45.311 r0 top (schematic designator R11)
R11_U_relay_ladder3 "R/128" R2012_0805I_L 94.999,17.411 r0 top (schematic designator R11)
R11_U_relay_ladder4 "R/128" R2012_0805I_L 98.699,46.211 r0 top (schematic designator R11)
R11_U_relay_ladder5 "R/128" R2012_0805I_L 170.999,15.211 r0 top (schematic designator R11)
R11_U_relay_ladder6 "R/128" R2012_0805I_L 170.699,44.011 r0 top (schematic designator R11)
R11_U_relay_ladder7 "R/128" R2012_0805I_L 43.621,57.216 r90 top (schematic designator R11)
R11_U_relay_ladder8 "R/128" R2012_0805I_L 21.399,77.611 r0 top (schematic designator R11)
R11_U_relay_ladder9 "R/128" R2012_0805I_L 21.399,115.411 r0 top (schematic designator R11)
R11_U_relay_ladder10 "R/128" R2012_0805I_L 21.399,143.811 r0 top (schematic designator R11)
R12_U_relay_ladder1 "R/256" R2012_0805I_L 240.565,15.111 r0 top (schematic designator R12)
R12_U_relay_ladder2 "R/256" R2012_0805I_L 239.865,45.311 r0 top (schematic designator R12)
R12_U_relay_ladder3 "R/256" R2012_0805I_L 109.265,17.411 r0 top (schematic designator R12)
R12_U_relay_ladder4 "R/256" R2012_0805I_L 112.965,46.211 r0 top (schematic designator R12)
R12_U_relay_ladder5 "R/256" R2012_0805I_L 185.265,15.211 r0 top (schematic designator R12)
R12_U_relay_ladder6 "R/256" R2012_0805I_L 184.965,44.011 r0 top (schematic designator R12)
R12_U_relay_ladder7 "R/256" R2012_0805I_L 2.48,46.913 r90 top (schematic designator R12)
R12_U_relay_ladder8 "R/256" R2012_0805I_L 35.665,77.611 r0 top (schematic designator R12)
R12_U_relay_ladder9 "R/256" R2012_0805I_L 35.665,115.411 r0 top (schematic designator R12)
R12_U_relay_ladder10 "R/256" R2012_0805I_L 35.665,143.811 r0 top (schematic designator R12)
R13_U_relay_ladder1 "R/2" R2012_0805I_L 237.712,15.111 r0 top (schematic designator R13)
R13_U_relay_ladder2 "R/2" R2012_0805I_L 237.012,45.311 r0 top (schematic designator R13)
R13_U_relay_ladder3 "R/2" R2012_0805I_L 106.412,17.411 r0 top (schematic designator R13)
R13_U_relay_ladder4 "R/2" R2012_0805I_L 110.112,46.211 r0 top (schematic designator R13)
R13_U_relay_ladder5 "R/2" R2012_0805I_L 182.412,15.211 r0 top (schematic designator R13)
R13_U_relay_ladder6 "R/2" R2012_0805I_L 182.112,44.011 r0 top (schematic designator R13)
R13_U_relay_ladder7 "R/2" R2012_0805I_L 0.827,46.913 r90 top (schematic designator R13)
R13_U_relay_ladder8 "R/2" R2012_0805I_L 32.812,77.611 r0 top (schematic designator R13)
R13_U_relay_ladder9 "R/2" R2012_0805I_L 32.812,115.411 r0 top (schematic designator R13)
R13_U_relay_ladder10 "R/2" R2012_0805I_L 32.812,143.811 r0 top (schematic designator R13)
R14_U_relay_ladder1 "R/4" R2012_0805I_L 234.859,15.111 r0 top (schematic designator R14)
R14_U_relay_ladder2 "R/4" R2012_0805I_L 234.159,45.311 r0 top (schematic designator R14)
R14_U_relay_ladder3 "R/4" R2012_0805I_L 103.559,17.411 r0 top (schematic designator R14)
R14_U_relay_ladder4 "R/4" R2012_0805I_L 107.259,46.211 r0 top (schematic designator R14)
R14_U_relay_ladder5 "R/4" R2012_0805I_L 179.559,15.211 r0 top (schematic designator R14)
R14_U_relay_ladder6 "R/4" R2012_0805I_L 179.259,44.011 r0 top (schematic designator R14)
R14_U_relay_ladder7 "R/4" R2012_0805I_L 48.58,57.216 r90 top (schematic designator R14)
R14_U_relay_ladder8 "R/4" R2012_0805I_L 29.959,77.611 r0 top (schematic designator R14)
R14_U_relay_ladder9 "R/4" R2012_0805I_L 29.959,115.411 r0 top (schematic designator R14)
R14_U_relay_ladder10 "R/4" R2012_0805I_L 29.959,143.811 r0 top (schematic designator R14)
R15_U_relay_ladder1 "R/8" R2012_0805I_L 214.886,15.111 r0 top (schematic designator R15)
R15_U_relay_ladder2 "R/8" R2012_0805I_L 214.186,45.311 r0 top (schematic designator R15)
R15_U_relay_ladder3 "R/8" R2012_0805I_L 83.586,17.411 r0 top (schematic designator R15)
R15_U_relay_ladder4 "R/8" R2012_0805I_L 87.286,46.211 r0 top (schematic designator R15)
R15_U_relay_ladder5 "R/8" R2012_0805I_L 159.586,15.211 r0 top (schematic designator R15)
R15_U_relay_ladder6 "R/8" R2012_0805I_L 159.286,44.011 r0 top (schematic designator R15)
R15_U_relay_ladder7 "R/8" R2012_0805I_L 37.008,57.216 r90 top (schematic designator R15)
R15_U_relay_ladder8 "R/8" R2012_0805I_L 9.986,77.611 r0 top (schematic designator R15)
R15_U_relay_ladder9 "R/8" R2012_0805I_L 9.986,115.411 r0 top (schematic designator R15)
R15_U_relay_ladder10 "R/8" R2012_0805I_L 9.986,143.811 r0 top (schematic designator R15)
R16_U_relay_ladder1 "R/16" R2012_0805I_L 212.033,15.111 r0 top (schematic designator R16)
R16_U_relay_ladder2 "R/16" R2012_0805I_L 211.333,45.311 r0 top (schematic designator R16)
R16_U_relay_ladder3 "R/16" R2012_0805I_L 80.733,17.411 r0 top (schematic designator R16)
R16_U_relay_ladder4 "R/16" R2012_0805I_L 84.433,46.211 r0 top (schematic designator R16)
R16_U_relay_ladder5 "R/16" R2012_0805I_L 156.733,15.211 r0 top (schematic designator R16)
R16_U_relay_ladder6 "R/16" R2012_0805I_L 156.433,44.011 r0 top (schematic designator R16)
R16_U_relay_ladder7 "R/16" R2012_0805I_L 35.355,57.216 r90 top (schematic designator R16)
R16_U_relay_ladder8 "R/16" R2012_0805I_L 7.133,77.611 r0 top (schematic designator R16)
R16_U_relay_ladder9 "R/16" R2012_0805I_L 7.133,115.411 r0 top (schematic designator R16)
R16_U_relay_ladder10 "R/16" R2012_0805I_L 7.133,143.811 r0 top (schematic designator R16)
R17_U_relay_ladder1 "R/32" R2012_0805I_L 209.18,15.111 r0 top (schematic designator R17)
R17_U_relay_ladder2 "R/32" R2012_0805I_L 208.48,45.311 r0 top (schematic designator R17)
R17_U_relay_ladder3 "R/32" R2012_0805I_L 77.88,17.411 r0 top (schematic designator R17)
R17_U_relay_ladder4 "R/32" R2012_0805I_L 81.58,46.211 r0 top (schematic designator R17)
R17_U_relay_ladder5 "R/32" R2012_0805I_L 153.88,15.211 r0 top (schematic designator R17)
R17_U_relay_ladder6 "R/32" R2012_0805I_L 153.58,44.011 r0 top (schematic designator R17)
R17_U_relay_ladder7 "R/32" R2012_0805I_L 33.701,57.216 r90 top (schematic designator R17)
R17_U_relay_ladder8 "R/32" R2012_0805I_L 4.28,77.611 r0 top (schematic designator R17)
R17_U_relay_ladder9 "R/32" R2012_0805I_L 4.28,115.411 r0 top (schematic designator R17)
R17_U_relay_ladder10 "R/32" R2012_0805I_L 4.28,143.811 r0 top (schematic designator R17)
R18_U_relay_ladder1 "R/64" R2012_0805I_L 223.446,15.111 r0 top (schematic designator R18)
R18_U_relay_ladder2 "R/64" R2012_0805I_L 222.746,45.311 r0 top (schematic designator R18)
R18_U_relay_ladder3 "R/64" R2012_0805I_L 92.146,17.411 r0 top (schematic designator R18)
R18_U_relay_ladder4 "R/64" R2012_0805I_L 95.846,46.211 r0 top (schematic designator R18)
R18_U_relay_ladder5 "R/64" R2012_0805I_L 168.146,15.211 r0 top (schematic designator R18)
R18_U_relay_ladder6 "R/64" R2012_0805I_L 167.846,44.011 r0 top (schematic designator R18)
R18_U_relay_ladder7 "R/64" R2012_0805I_L 41.967,57.216 r90 top (schematic designator R18)
R18_U_relay_ladder8 "R/64" R2012_0805I_L 18.546,77.611 r0 top (schematic designator R18)
R18_U_relay_ladder9 "R/64" R2012_0805I_L 18.546,115.411 r0 top (schematic designator R18)
R18_U_relay_ladder10 "R/64" R2012_0805I_L 18.546,143.811 r0 top (schematic designator R18)
R19_U_relay_ladder1 "R/128" R2012_0805I_L 220.593,15.111 r0 top (schematic designator R19)
R19_U_relay_ladder2 "R/128" R2012_0805I_L 219.893,45.311 r0 top (schematic designator R19)
R19_U_relay_ladder3 "R/128" R2012_0805I_L 89.293,17.411 r0 top (schematic designator R19)
R19_U_relay_ladder4 "R/128" R2012_0805I_L 92.993,46.211 r0 top (schematic designator R19)
R19_U_relay_ladder5 "R/128" R2012_0805I_L 165.293,15.211 r0 top (schematic designator R19)
R19_U_relay_ladder6 "R/128" R2012_0805I_L 164.993,44.011 r0 top (schematic designator R19)
R19_U_relay_ladder7 "R/128" R2012_0805I_L 40.314,57.216 r90 top (schematic designator R19)
R19_U_relay_ladder8 "R/128" R2012_0805I_L 15.693,77.611 r0 top (schematic designator R19)
R19_U_relay_ladder9 "R/128" R2012_0805I_L 15.693,115.411 r0 top (schematic designator R19)
R19_U_relay_ladder10 "R/128" R2012_0805I_L 15.693,143.811 r0 top (schematic designator R19)
R20_U_relay_ladder1 "R/256" R2012_0805I_L 217.739,15.111 r0 top (schematic designator R20)
R20_U_relay_ladder2 "R/256" R2012_0805I_L 217.039,45.311 r0 top (schematic designator R20)
R20_U_relay_ladder3 "R/256" R2012_0805I_L 86.439,17.411 r0 top (schematic designator R20)
R20_U_relay_ladder4 "R/256" R2012_0805I_L 90.139,46.211 r0 top (schematic designator R20)
R20_U_relay_ladder5 "R/256" R2012_0805I_L 162.439,15.211 r0 top (schematic designator R20)
R20_U_relay_ladder6 "R/256" R2012_0805I_L 162.139,44.011 r0 top (schematic designator R20)
R20_U_relay_ladder7 "R/256" R2012_0805I_L 38.661,57.216 r90 top (schematic designator R20)
R20_U_relay_ladder8 "R/256" R2012_0805I_L 12.839,77.611 r0 top (schematic designator R20)
R20_U_relay_ladder9 "R/256" R2012_0805I_L 12.839,115.411 r0 top (schematic designator R20)
R20_U_relay_ladder10 "R/256" R2012_0805I_L 12.839,143.811 r0 top (schematic designator R20)
R21 "100k" R1005_0402i_L 293.143,1.013 r90 top
R22 "100k" R1005_0402i_L 292.23,1.013 r90 top
R23 "100k" R1005_0402i_L 294.056,1.013 r90 top
R24 "100k" R1005_0402i_L 295.883,1.013 r90 top
R25 "100k" R1005_0402i_L 294.969,1.013 r90 top
TP1 "PAD" PAD_CIRC_HOLE 267.215,0.773 r90 top
TP2 "PAD" PAD_CIRC_HOLE 276.146,0.773 r90 top
TP3 "PAD" PAD_CIRC_HOLE 278.379,0.773 r90 top
TP4 "PAD" PAD_CIRC_HOLE 280.612,0.773 r90 top
TP5 "PAD" PAD_CIRC_HOLE 269.448,0.773 r90 top
TP6 "PAD" PAD_CIRC_HOLE 271.68,0.773 r90 top
TP7 "PAD" PAD_CIRC_HOLE 273.913,0.773 r90 top
TP8 "PAD" PAD_CIRC_HOLE 260.516,0.773 r90 top
TP9 "PAD" PAD_CIRC_HOLE 262.749,0.773 r90 top
TP10 "PAD" PAD_CIRC_HOLE 264.982,0.773 r90 top
ULN1 "ULN2803" QFN127P600-8N 296.371,4.316 r0 top
ULN2 "ULN2803" QFN127P600-8N 301.999,4.316 r0 top
ULN3 "ULN2803" QFN127P600-8N 307.627,4.316 r0 top
ULN4 "ULN2803" QFN127P600-8N 273.858,4.316 r0 top
ULN5 "ULN2803" QFN127P600-8N 268.23,4.316 r0 top
ULN6 "ULN2803" QFN127P600-8N 262.602,4.316 r0 top
ULN7 "ULN2803" QFN127P600-8N 290.743,4.316 r0 top
ULN8 "ULN2803" QFN127P600-8N 285.114,4.316 r0 top
ULN9 "ULN2803" QFN127P600-8N 279.486,4.316 r0 top
ULN10 "ULN2803" QFN127P600-8N 305.076,30.119 r90 top
X1 "PTS636_SM25_SMTR_LFS" PTS636SM25SMTRLFS 319.802,59.569 r90 top

## Footprints (in the part's own frame and the unit in brackets; to place one, negate y for a bottom-side part, rotate by r counter-clockwise, add the part's x,y. Pads: shape width x height; smd on the part's side, far side on the other; paste and mask are expansions set on the pad)
"1.27mm SMD conn" [mm]
  rect 0.76x2.4 smd: 1(3.175,1.905) 2(3.175,-1.905) 3(1.905,1.905) 4(1.905,-1.905) 5(0.635,1.905) 6(0.635,-1.905) 7(-0.635,1.905) 8(-0.635,-1.905) 9(-1.905,1.905) 10(-1.905,-1.905) 11(-3.175,1.905) 12(-3.175,-1.905)
"AXICOM IM-G Relay" [mm] "TE CONNECTIVITY AXICOM IM-G (Gull wings) Relay SMD"
  rect 0.7x2 smd: 1(-3.797,-3.2) 2(-0.597,-3.2) 3(1.6,-3.2) 4(3.797,-3.2) 5(3.797,3.2) 6(1.6,3.2) 7(-0.597,3.2) 8(-3.797,3.2)
  silkscreen extent -5,-3 5,3
C1608_0603I_L [mm] "Chip Capacitor, 2-Leads, Body 1.57x0.85mm, IPC High Density"
  rect 0.72x0.9 smd: 1(-0.6,0) 2(0.6,0)
  body extent -0.82,-0.48 0.82,0.48, height 0.95
"C AlElko 5x11 R2" [mm]
  round 1.27 hole 0.711: 1(1,0) 2(-1,0)
  silkscreen extent -2.5,-2.5 2.5,2.5, body extent -2.5,-2.5 2.5,2.5, height 11.01
HDR1X5 [mm] "Connector; Header; 5 Position"
  rect 1.5x1.5 hole 0.9: 1(0,0)
  round 1.5 hole 0.9: 2(2.54,0) 3(5.08,0) 4(7.62,0) 5(10.16,0)
  silkscreen extent -1.27,-1.27 11.43,1.27
HDR2X10 [mm] "Connector; Header; 10x2 Position"
  rect 1.5x1.5 hole 0.9: 1(0,0)
  round 1.5 hole 0.9: 2(0,2.54) 3(2.54,0) 4(2.54,2.54) 5(5.08,0) 6(5.08,2.54) 7(7.62,0) 8(7.62,2.54) 9(10.16,0) 10(10.16,2.54) 11(12.7,0) 12(12.7,2.54) 13(15.24,0) 14(15.24,2.54) 15(17.78,0) 16(17.78,2.54) 17(20.32,0) 18(20.32,2.54) 19(22.86,0) 20(22.86,2.54)
  silkscreen extent -1.27,-1.27 24.13,3.81
"MCP23017 QFN" [mm] "QFN, 28-Leads, Body 6,00x6,00mm, Pitch 0,65mm, Thermal Pad 3,93x3,93mm, IPC High Density"
  oval 1x0.3 smd: 1(-2.725,1.95) 2(-2.725,1.3) 3(-2.725,0.65) 4(-2.725,0) 5(-2.725,-0.65) 6(-2.725,-1.3) 7(-2.725,-1.95) 15(2.725,-1.95) 16(2.725,-1.3) 17(2.725,-0.65) 18(2.725,0) 19(2.725,0.65) 20(2.725,1.3) 21(2.725,1.95)
  oval 0.3x1 smd: 8(-1.95,-2.725) 9(-1.3,-2.725) 10(-0.65,-2.725) 11(0,-2.725) 12(0.65,-2.725) 13(1.3,-2.725) 14(1.95,-2.725) 22(1.95,2.725) 23(1.3,2.725) 24(0.65,2.725) 25(0,2.725) 26(-0.65,2.725) 27(-1.3,2.725) 28(-1.95,2.725)
  rect 3.93x3.93 smd: 29(0,0)
  silkscreen extent -3.92,-3.15 3.15,3.15, body extent -3,-3 3,3, height 0.9
PAD_CIRC_HOLE [mil]
  round 74 hole 39.4: 1(0,0)
PTS636SM25SMTRLFS [mm]
  rect 1.25x1 smd: 1(-3.875,0) 2(3.875,0)
  silkscreen extent -5.3,-1.85 3.05,1.85
QFN50P400X400X60-28N-D [mm]
  rect 0.6x0.3 smd: 1(-2.1,1.5) 2(-2.1,1) 3(-2.1,0.5) 4(-2.1,0) 5(-2.1,-0.5) 6(-2.1,-1) 7(-2.1,-1.5) 15(2.1,-1.5) 16(2.1,-1) 17(2.1,-0.5) 18(2.1,0) 19(2.1,0.5) 20(2.1,1) 21(2.1,1.5)
  rect 0.3x0.6 smd: 8(-1.5,-2.1) 9(-1,-2.1) 10(-0.5,-2.1) 11(0,-2.1) 12(0.5,-2.1) 13(1,-2.1) 14(1.5,-2.1) 22(1.5,2.1) 23(1,2.1) 24(0.5,2.1) 25(0,2.1) 26(-0.5,2.1) 27(-1,2.1) 28(-1.5,2.1)
  silkscreen extent -2.67,-2.67 2.67,2.67
QFN127P600-8N [mm]
  oval 0.85x0.25 smd: 1(-1.825,1) 2(-1.825,0.5) 3(-1.825,0) 4(-1.825,-0.5) 5(-1.825,-1) 11(1.825,-1) 12(1.825,-0.5) 13(1.825,0) 14(1.825,0.5) 15(1.825,1)
  oval 0.25x0.85 smd: 6(-1,-1.825) 7(-0.5,-1.825) 8(0,-1.825) 9(0.5,-1.825) 10(1,-1.825) 16(1,1.825) 17(0.5,1.825) 18(0,1.825) 19(-0.5,1.825) 20(-1,1.825)
  rect 2.3x2.3 smd: 21(0,0)
  silkscreen extent -2.97,-2.2 2.2,2.2, body extent -2.05,-2.05 2.05,2.05, height 0.8
R1005_0402i_L [mm] "Resistor, Chip; 1.00 mm L X 0.50 mm W X 0.40 mm H body"
  rrect50% 0.52x0.56 smd: 1(-0.44,0) 2(0.44,0)
  body extent -0.5,-0.25 0.5,0.25, height 0.4
R2012_0805I_L [mm] "Chip Resistor, 2-Leads, Body 2.05x1.25mm, IPC High Density"
  rect 0.8x1.3 smd: 1(-0.85,0) 2(0.85,0)
  silkscreen extent -0.05,-0.55 0.05,0.55, body extent -1.1,-0.7 1.1,0.7, height 0.8
solder_jumper_triangle [mil]
  rect 15x30 smd paste+0 mask+0: 1(45,20) 2(-10,20)
  Top Layer region: 5,20 25,40 -20,40 -20,0 25,0
  Top Layer region: 55,40 35,40 15,20 35,0 55,0
  Top Layer region: 3.94,0
solderJumper [mil]
  rect 25x25 smd: 1(20,0) 2(-20,0)
  Top Layer region: 2.51,25 12.08,23.1 20.19,17.68 25.61,9.57 27.51,0 27.51,0 25.61,-9.57 20.19,-17.68 12.08,-23.1 2.51,-25 2.51,-25
  Top Layer region: -2.51,25 -12.08,23.1 -20.19,17.68 -25.61,9.57 -27.51,0 -27.51,0 -25.61,-9.57 -20.19,-17.68 -12.08,-23.1 -2.51,-25 -2.51,-25
SON50P300X300X80-11N-D [mm]
  rect 0.85x0.3 smd: 1(-1.45,1) 2(-1.45,0.5) 3(-1.45,0) 4(-1.45,-0.5) 5(-1.45,-1) 6(1.45,-1) 7(1.45,-0.5) 8(1.45,0) 9(1.45,0.5) 10(1.45,1)
  rect 1.7x2.4 smd: 11(0,0)
  silkscreen extent -2,1.53 -1.75,1.77
TSOP95P280X110-6L [mm] "TSOP, 6-Leads, Body 2,87x1,50mm, Pitch 0,95mm, IPC High Density"
  rect 0.8x0.55 smd: 1(-1.25,0.95) 2(-1.25,0) 3(-1.25,-0.95) 4(1.25,-0.95) 5(1.25,0.95)
  silkscreen extent -1.37,-1.6 0.45,1.9, body extent -1.38,-1.6 1.38,1.6, height 1.1